# Altium PCB PCB1.PcbDoc
Units mm, origin at the board's own origin, x right, y up, seen from the top; angles counter-clockwise.
Board outline 40 x 60 mm, 2 copper layers (Top Layer, Bottom Layer); 6 components, 8 nets, 44 pads, 0 vias.
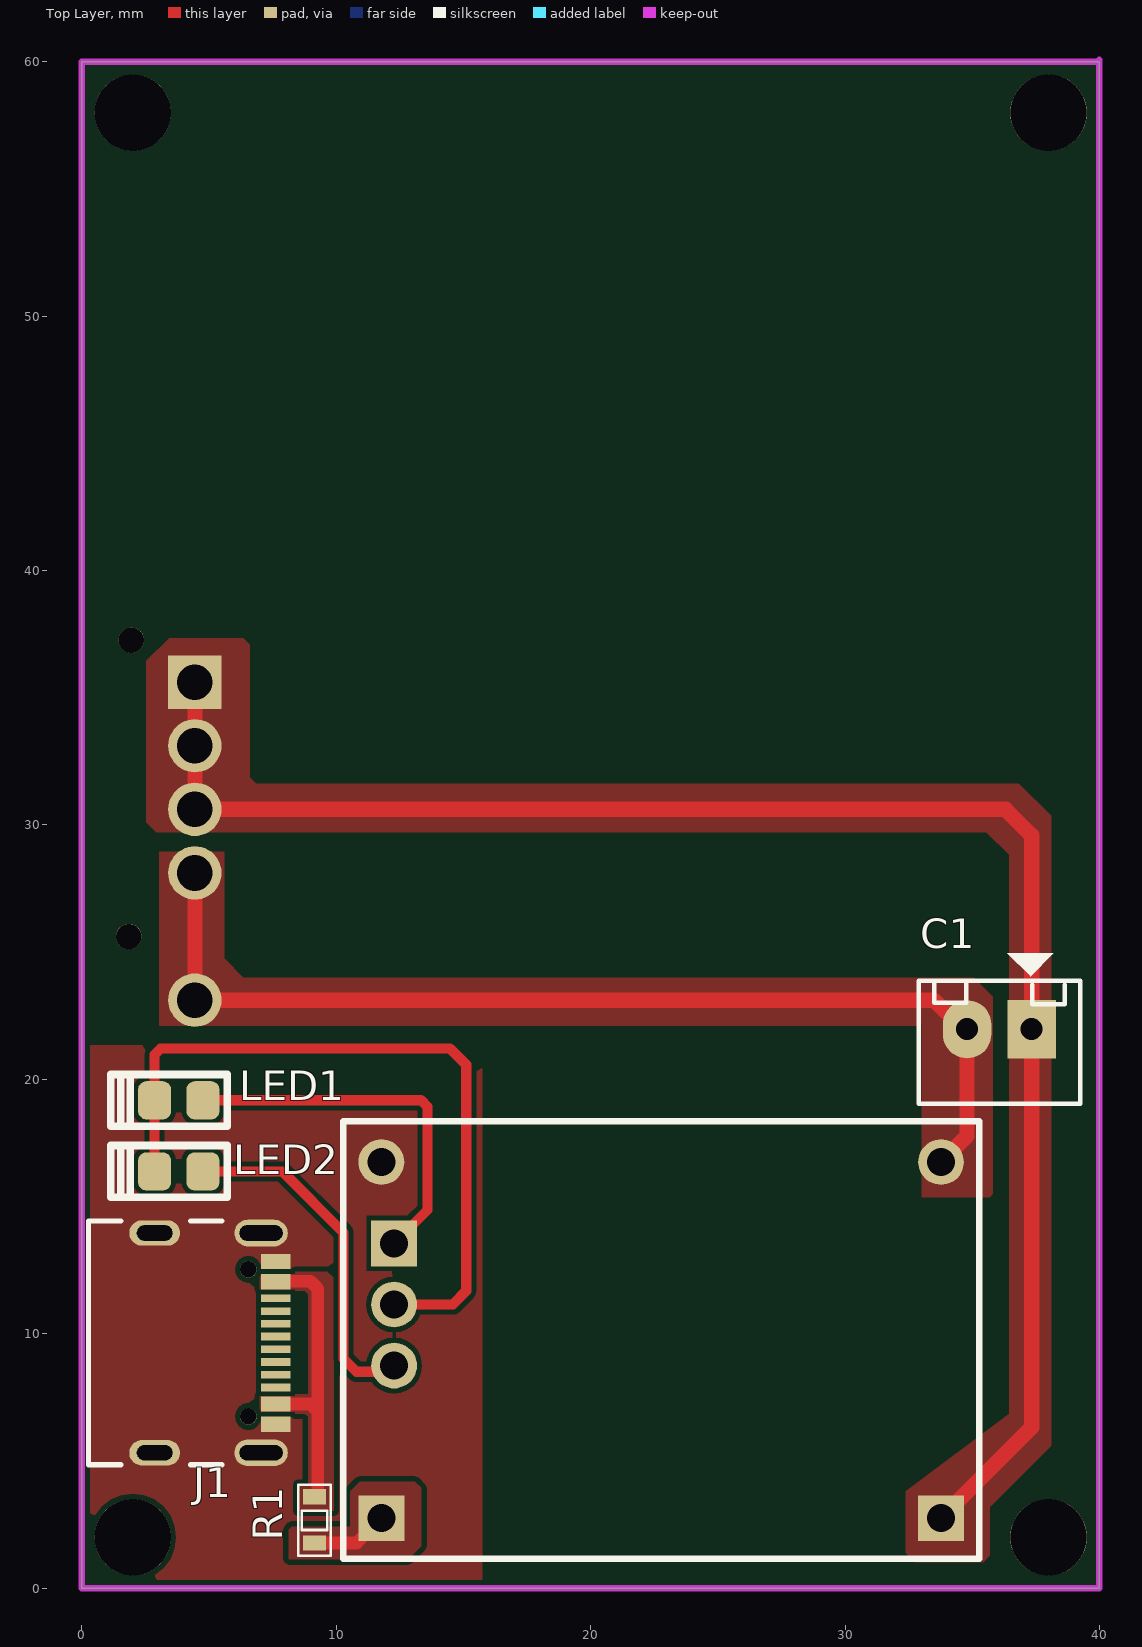
[diagram p0: Top Layer view]
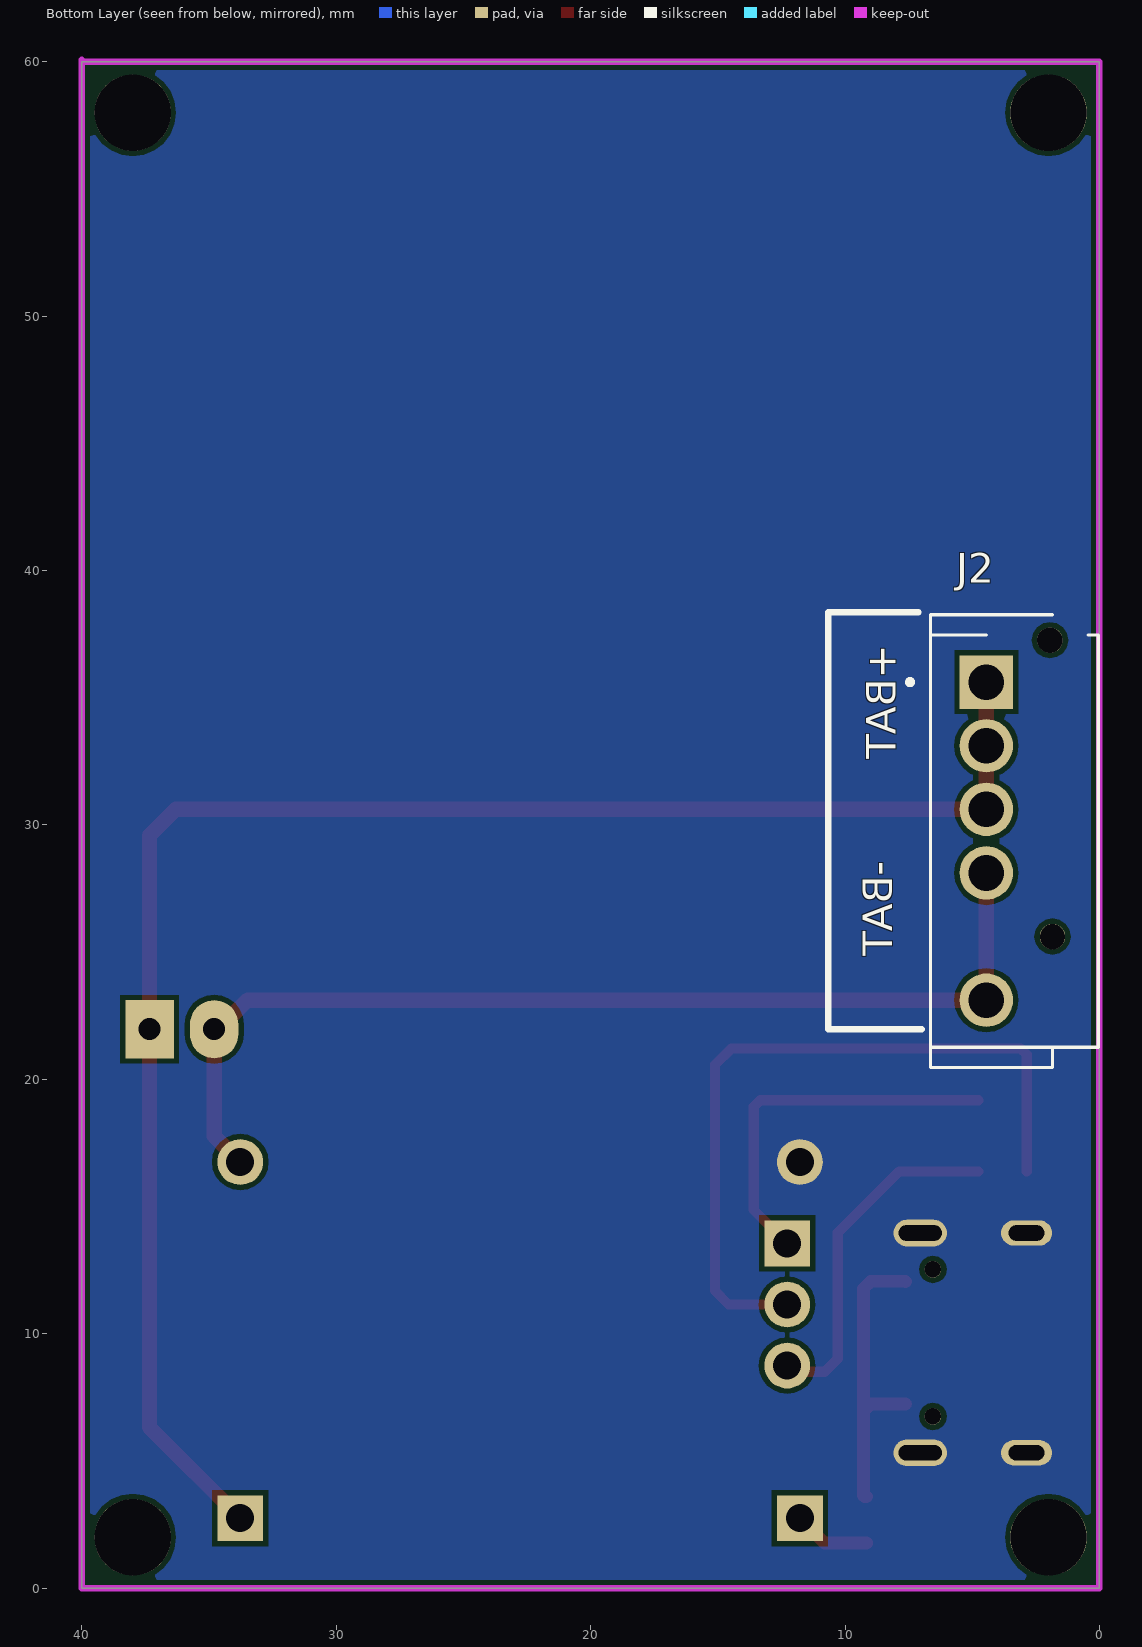
[diagram p1: Bottom Layer view, seen from below]
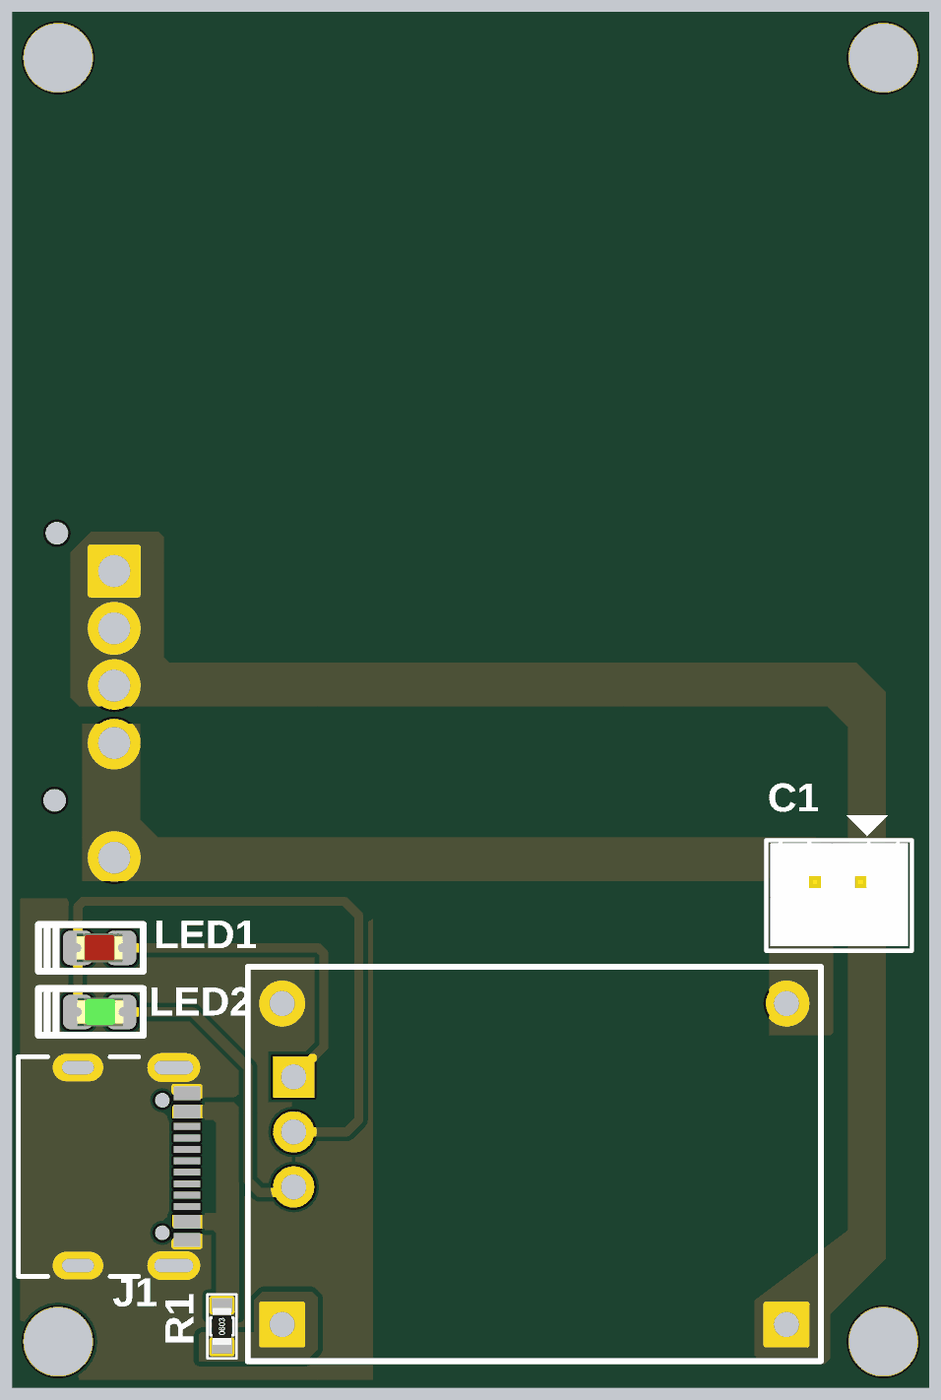
[diagram p2: 3D render of the assembled board from above, using the file's embedded part models]

## Layer stack, top to bottom
Top Solder: solder mask 0.0102, Solder Resist, Dk 3.5
Top Layer: signal copper 0.0356
Dielectric 1: dielectric 0.32, FR-4, Dk 4.8
Bottom Layer: signal copper 0.0356
Bottom Solder: solder mask 0.0102, Solder Resist, Dk 3.5

## Board outline
0,0 0,60 40,60 40,0

## Design rules (kind name [scope] priority, off if disabled: settings)
Clearance [All] p1: gap=0.2 ignorepadtopadclearanceinfootprint=FALSE
PlaneClearance [All] p1: clearance=0.5
PlaneConnect [All] p1: planeconnectstyle=Direct reliefexpansion=0.508 reliefentries=4 reliefconductorwidth=0.254 reliefairgap=0.254
PolygonConnect [All] p1: connectstyle=Direct reliefconductorwidth=0.254 reliefentries=4 polygonreliefangle="90 Angle" airgapwidth=0.254
RoutingVias [All] p1: holewidth=0.711 width=1.27 viastyle="Through Hole" minholewidth=0.711 minwidth=1.27 maxholewidth=0.711 maxwidth=1.27
SolderMaskExpansion [All] p1: expansion=0.102 istentingtop=FALSE
Width [All] p1: maxlimit=0.6 minlimit=0.4 preferedwidth=0.5
28 further rules are at their usual default settings.

## Classes and differential pairs
component class Sheet1: C1 J1 J2 LED1 R1

## Components (designator, comment, footprint, x,y, rotation, side; value= is the part's Value field where it differs from the comment)
C1 "Header2" Header2 37.338,21.971 r180 top
J1 "USB4105_REVA" GCT_USB4105_REVA 2.865,9.64 r270 top
J2 "1565986-1" TE_1565986-1 4.445,29.364 r270 bottom locked
LED1 "LED-0805RVC" "Led 0805R" 3.81,19.177 r180 top value=Red
LED2 "LED-0805GVC" "Led 0805G" 3.81,16.383 r180 top value=Green
R1 "0R" RES-SMD-0603 9.144,2.667 r90 top

## Footprints (in the part's own frame and the unit in brackets; to place one, negate y for a bottom-side part, rotate by r counter-clockwise, add the part's x,y. Pads: shape width x height; smd on the part's side, far side on the other; paste and mask are expansions set on the pad)
GCT_USB4105_REVA [mm]
  rect 0.6x1.15 smd: A1/B12(-3.2,4.755) A4/B9(-2.4,4.755) B1/A12(3.2,4.755) B4/A9(2.4,4.755)
  rect 0.3x1.15 smd: A5(-1.25,4.755) A6(-0.25,4.755) A7(0.25,4.755) A8(1.25,4.755) B5(1.75,4.755) B6(0.75,4.755) B7(-0.75,4.755) B8(-1.75,4.755)
  oval 1x2 hole 0.6 slot 1.4 at 90 deg: G1(-4.32,0) G2(4.32,0)
  oval 1.05x2.1 hole 0.6 slot 1.7 at 90 deg: G3(-4.32,4.18) G4(4.32,4.18)
  round 0.65 hole 0.65 unplated: ""(-2.89,3.68) ""(2.89,3.68)
  silkscreen extent -4.79,-2.6 4.79,2.65
Header2 [mil] "CON2"
  rect 75x90 hole 34: 1(0,0)
  oval 75x90 hole 34: 2(100,0)
  silkscreen extent -75,-118 175,115, body extent -68,-70 168,107, height 236
"Led 0805G" [mm]
  rrect50% 1.3x1.5 smd: 1(-0.95,0) 2(0.95,0)
  silkscreen extent -1.91,-1.02 2.67,1.02, body extent -1.04,-0.62 0.98,0.62, height 1.1
"Led 0805R" [mm]
  rrect50% 1.3x1.5 smd: 1(-0.95,0) 2(0.95,0)
  silkscreen extent -1.91,-1.02 2.67,1.02, body extent -1.01,-0.63 1.01,0.62, height 1.1
RES-SMD-0603 [mm]
  rect 0.6x0.9 smd: 1(-0.889,0) 2(0.927,0)
  silkscreen extent -1.4,-0.64 1.4,0.64, body extent -0.8,-0.4 0.8,0.4, height 0.43
TE_1565986-1 [mm]
  rect 2.1x2.1 hole 1.4: 1(-6.25,0)
  round 2.1 hole 1.4: 2(-3.75,0) 3(-1.25,0) 4(1.25,0) 5(6.25,0)
  round 1 hole 1 unplated: ""(-7.9,2.5) ""(3.75,2.6)
  silkscreen extent -8.9,-3.1 8.9,4.4

## Part data
C1: "Header IDC, 2 x 1 Pin Vertical 2.54mm Pitch (Non-Boxed, Male)", Manufacturer="W¨¹rth Elektronik eiSos GmbH", partNo=613002143121, ComponentLink1 Description=Manufacturer, ComponentLink1URL=http://www.we-online.com, ComponentLink2 Description=Datasheet, ComponentLink2URL=http://katalog.we-online.de/em/datasheet/6130xx143121.pdf, Created by="Karrer Zheng", Created Date="29 March 2013", NoPins=02
J1: "USB-C _USB TYPE-C_ USB 2.0 Receptacle Connector 24 _16+8 Dummy_ Position Surface Mount, Right Angle; Through Hole", Package="Package Analog Devices", Availability=Unavailable, MF="Global Connector Technology", MP=USB4105, Price=None, SnapEDA_Link=https://www.snapeda.com/parts/USB4105/Global%20Connector%20Technology/view-part/4223080/?ref=snap
J2: "CONN RCPT 5POS 2.50MM PCB SLDR", Package=None, Availability=Unavailable, MP=1565986-1, Price=None
LED1: "LED Red 2mA 1.8V 0805", ComponentLink1Description=Datasheet, ComponentLink1URL="D:\Dropbox\Datasheets\Opto and Illumination\LEDs\SMD LED.pdf", Unit Price=0.0476
LED2: "LED Green 2mA 3V 0805", ComponentLink1Description=Datasheet, ComponentLink1URL="D:\Dropbox\Datasheets\Opto and Illumination\LEDs\SMD LED.pdf", Unit Price=0.0476
R1: library part Res-SMD, "Resistor", Manufacturer="Generic Components", Class=Passive, Published=08/06/2000, Publisher="Altium Hobart Technology Centre"

## Free pads (board coordinates)
  rect 1.8x1.8 hole 1.1: 1(11.774,2.75) 3(33.774,2.75) 5(12.274,13.55)
  round 1.8 hole 1.1: 2(11.774,16.75) 4(33.774,16.75) 6(12.274,11.15) 7(12.274,8.75)
  round 3 hole 3: 10(2,2) 11(38,2) 12(38,58) 13(2,58)

## Nets (pads, with @x,y where several pads share a name; then routed paths per layer and width w, separated by ;. In a path a pad name is that pad's centre, name@x,y a point inside that pad or via, vN(x,y) a via of type N, cw(c..) or ccw(c..) an arc to the next point about the centre after c; other vN are vias at no path point)
+5: pad.1 R1.1 | length 3
  Top Layer w0.5: R1.1 10.802,1.778 pad.1
+BAT: C1.1 J2.1 J2.2 J2.3 pad.3 | length 66.6
  Top Layer w0.6: J2.1 J2.2 J2.3 36.315,30.614 37.338,29.591 C1.1 37.338,6.314 pad.3
-BAT: C1.2 J2.4 J2.5 pad.4 | length 41.5
  Top Layer w0.6: J2.4 J2.5 33.492,23.114 34.635,21.971 C1.2 34.798,17.774 pad.4
charg: LED1.1 pad.5 | length 14.9
  Top Layer w0.4: LED1.1 13.335,19.177 13.589,18.923 13.589,14.865 pad.5
com: LED1.2 LED2.2 pad.6 | length 29.2
  Top Layer w0.4: LED2.2 LED1.2 2.86,20.975 3.094,21.209 14.478,21.209 15.113,20.574 15.113,11.684 14.579,11.15 pad.6
GND: J1.A1/B12 J1.B1/A12 J1.G1 J1.G2 J1.G3 J1.G4 pad.2
NetJ1_A4/B9: J1.A4/B9 J1.B4/A9 R1.2 | length 11.8
  Top Layer w0.5: J1.B4/A9 J1.B4/A9 8.978,7.239 9.271,6.946 ; J1.A4/B9 7.645,12.065 8.978,12.065 9.271,11.772 9.271,6.946 ; R1.2 9.221,3.594 9.271,3.644 9.271,6.946
std: LED2.1 pad.7 | length 13.8
  Top Layer w0.4: LED2.1 7.874,16.383 10.287,13.97 10.287,9.017 10.795,8.509 12.033,8.509 pad.7
pads on no net: J1. J1.A5 J1.A6 J1.A7 J1.A8 J1.B5 J1.B6 J1.B7 J1.B8 J2.

## Polygon pours and split planes (outlines as drawn)
GND on Top Layer "GND_L01_P004" (solid, remove dead copper, pour order 4): 0,21.336 14.986,21.336 15.748,20.574 15.748,-0.127 0.127,-0.127 0,0
NetJ1_A4/B9 on Top Layer "NETJ1_A4/B9_L01_P003" (solid, remove dead copper, pour order 3): 8.509,4.064 8.509,3.048 9.906,3.048 9.906,12.192 9.652,12.446 6.985,12.446 6.985,11.684 8.763,11.684 8.89,11.557 8.89,7.62 6.985,7.62 6.985,6.858 8.763,6.858 8.89,6.731 8.89,4.064
-BAT on Top Layer "bat-" (solid, remove dead copper, pour order 2): 33.02,15.367 35.687,15.367 35.814,15.494 35.814,23.241 35.052,24.003 6.35,24.003 5.588,24.765 5.588,28.956 3.048,28.956 3.048,22.098 32.893,22.098 33.02,22.225
+BAT on Top Layer "+BAT_L01_P001" (solid, remove dead copper, pour order 1): 32.385,3.81 32.385,1.397 32.766,1.016 35.433,1.016 35.687,1.27 35.687,3.175 38.1,5.588 38.1,30.353 36.83,31.623 6.858,31.623 6.604,31.877 6.604,37.084 6.35,37.338 3.429,37.338 2.54,36.449 2.54,30.099 2.921,29.718 35.56,29.718 36.449,28.829 36.449,6.858
+5 on Top Layer "+5_L01_P000" (solid, pour order 0): 8.255,2.413 8.128,2.286 8.128,1.143 12.827,1.143 13.335,1.651 13.335,3.937 13.081,4.191 10.922,4.191 10.541,3.81 10.541,2.413
GND on Bottom Layer "GND_L02_P005" (solid, remove dead copper, pour order 5): 0,0 40,0 40,60 0,60

## Keep-outs
Keep-Out Layer:
  lines w0.254: 40,60 0,60 0,0 40,0 40,60.076

## Silkscreen, mask and mechanical layers (free items; w line width, h text height)
Top Overlay:
  lines w0.254: 10.274,1.15 10.274,18.35 35.274,18.35 35.274,1.15 10.274,1.15
Bottom Overlay:
  lines w0.254: 6.985,21.971 10.668,21.971 10.668,38.354 7.112,38.354
  text "+BAT" at 7.62,37.084 h2 r270
  text "-BAT" at 7.747,28.575 h2 r270

## Text inside footprints (layer, text, board x,y; h text height)
J1: Mechanical 13 "PCB EDGE" at 0.365,4.24 h2 r270